# Altium PCB Dot_Matrix.PcbDoc
Units mm, origin at the board's own origin, x right, y up, seen from the top; angles counter-clockwise.
Board outline 63.12 x 62.99 mm, 2 copper layers (Top Layer, Bottom Layer); 61 components, 67 nets, 215 pads, 86 vias.
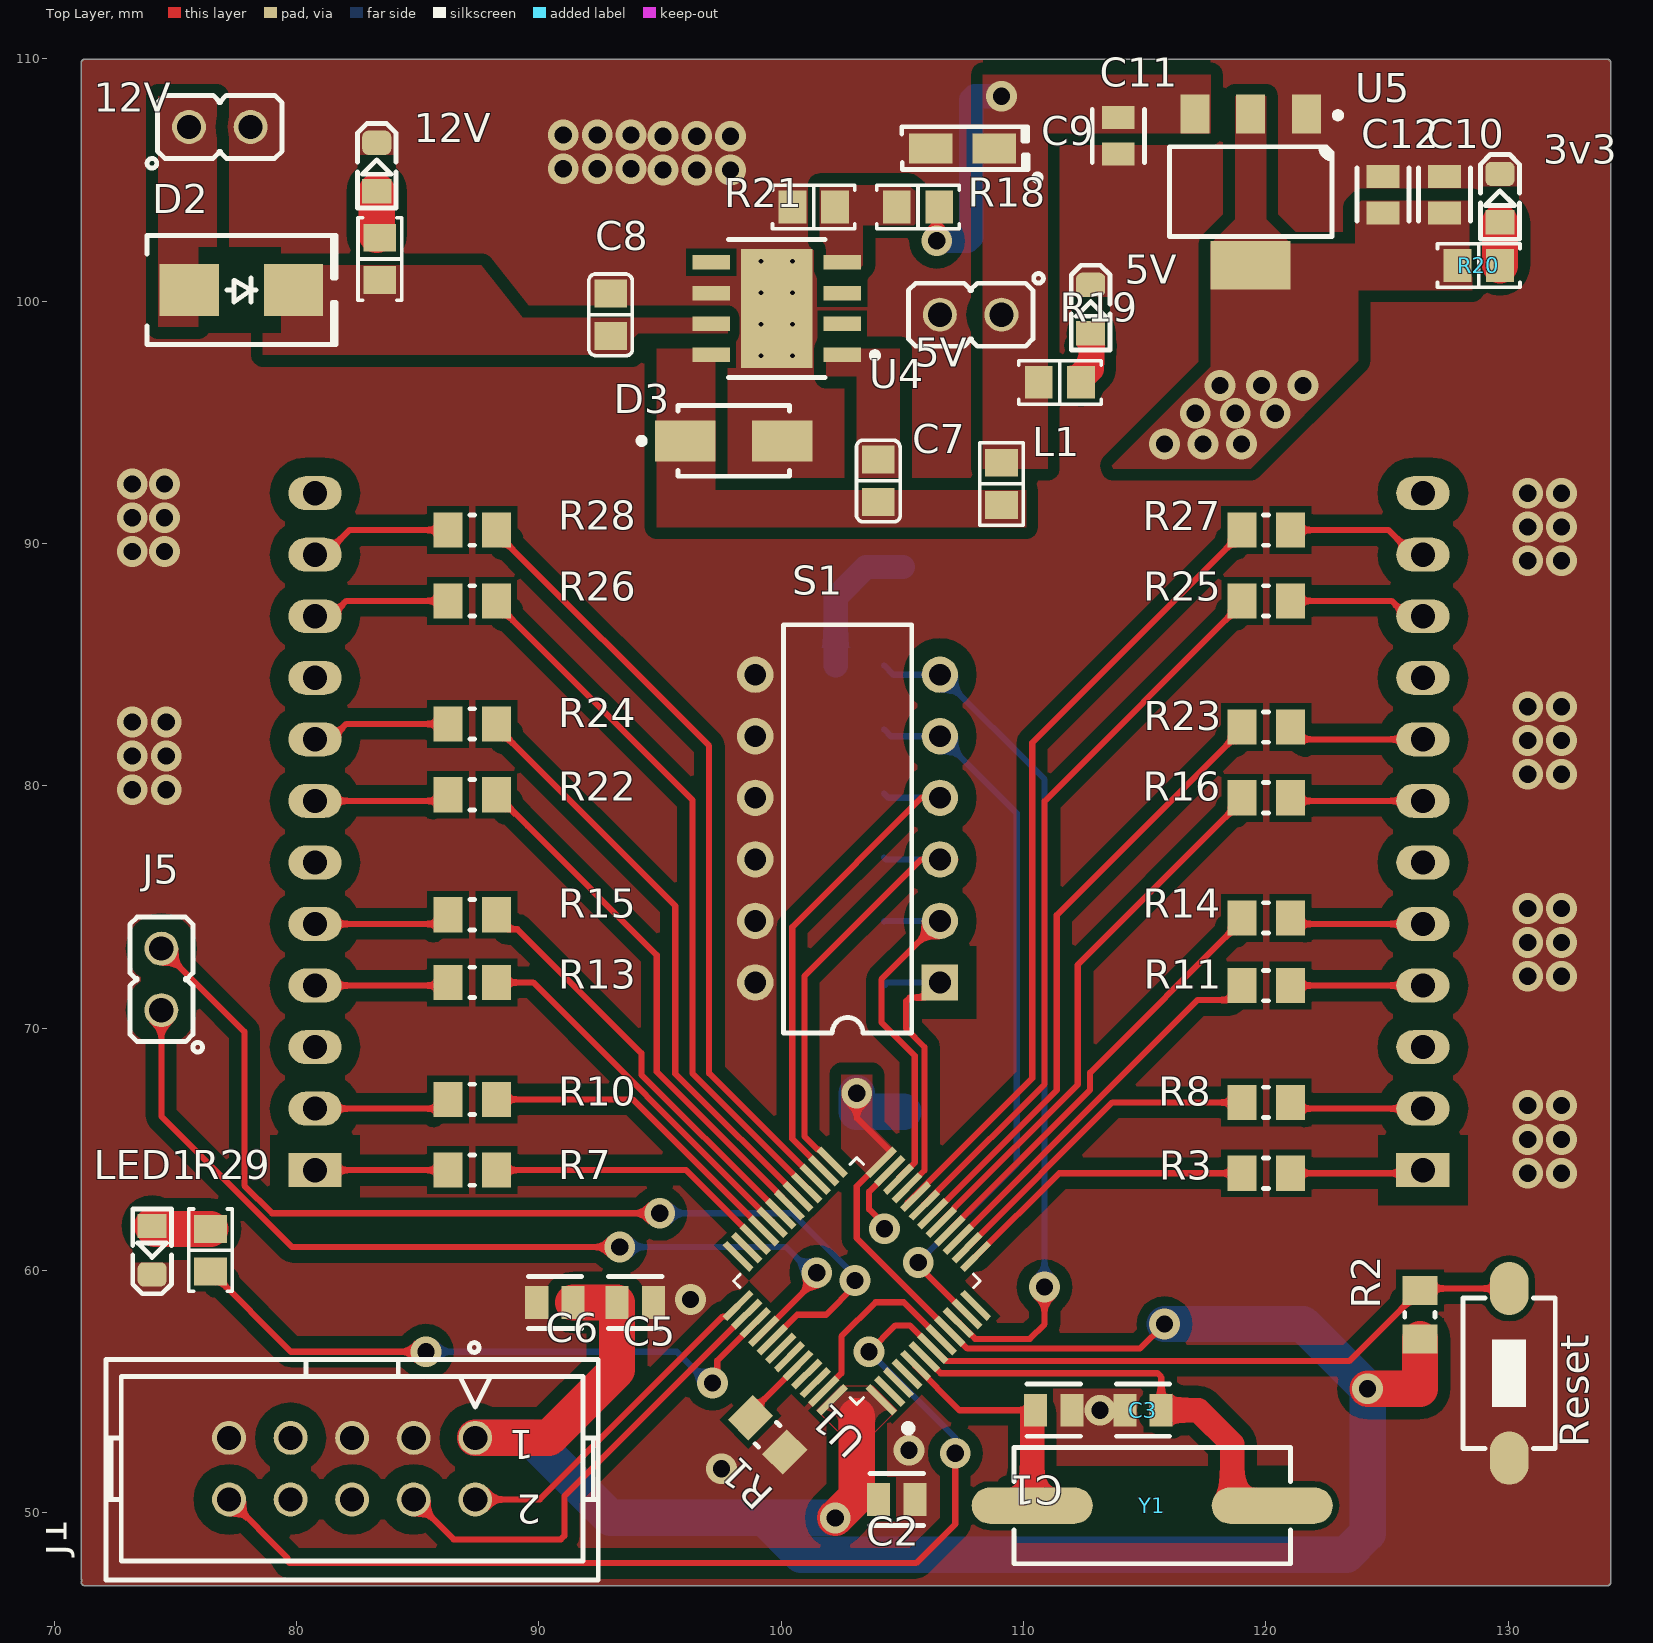
[diagram p0: Top Layer view]
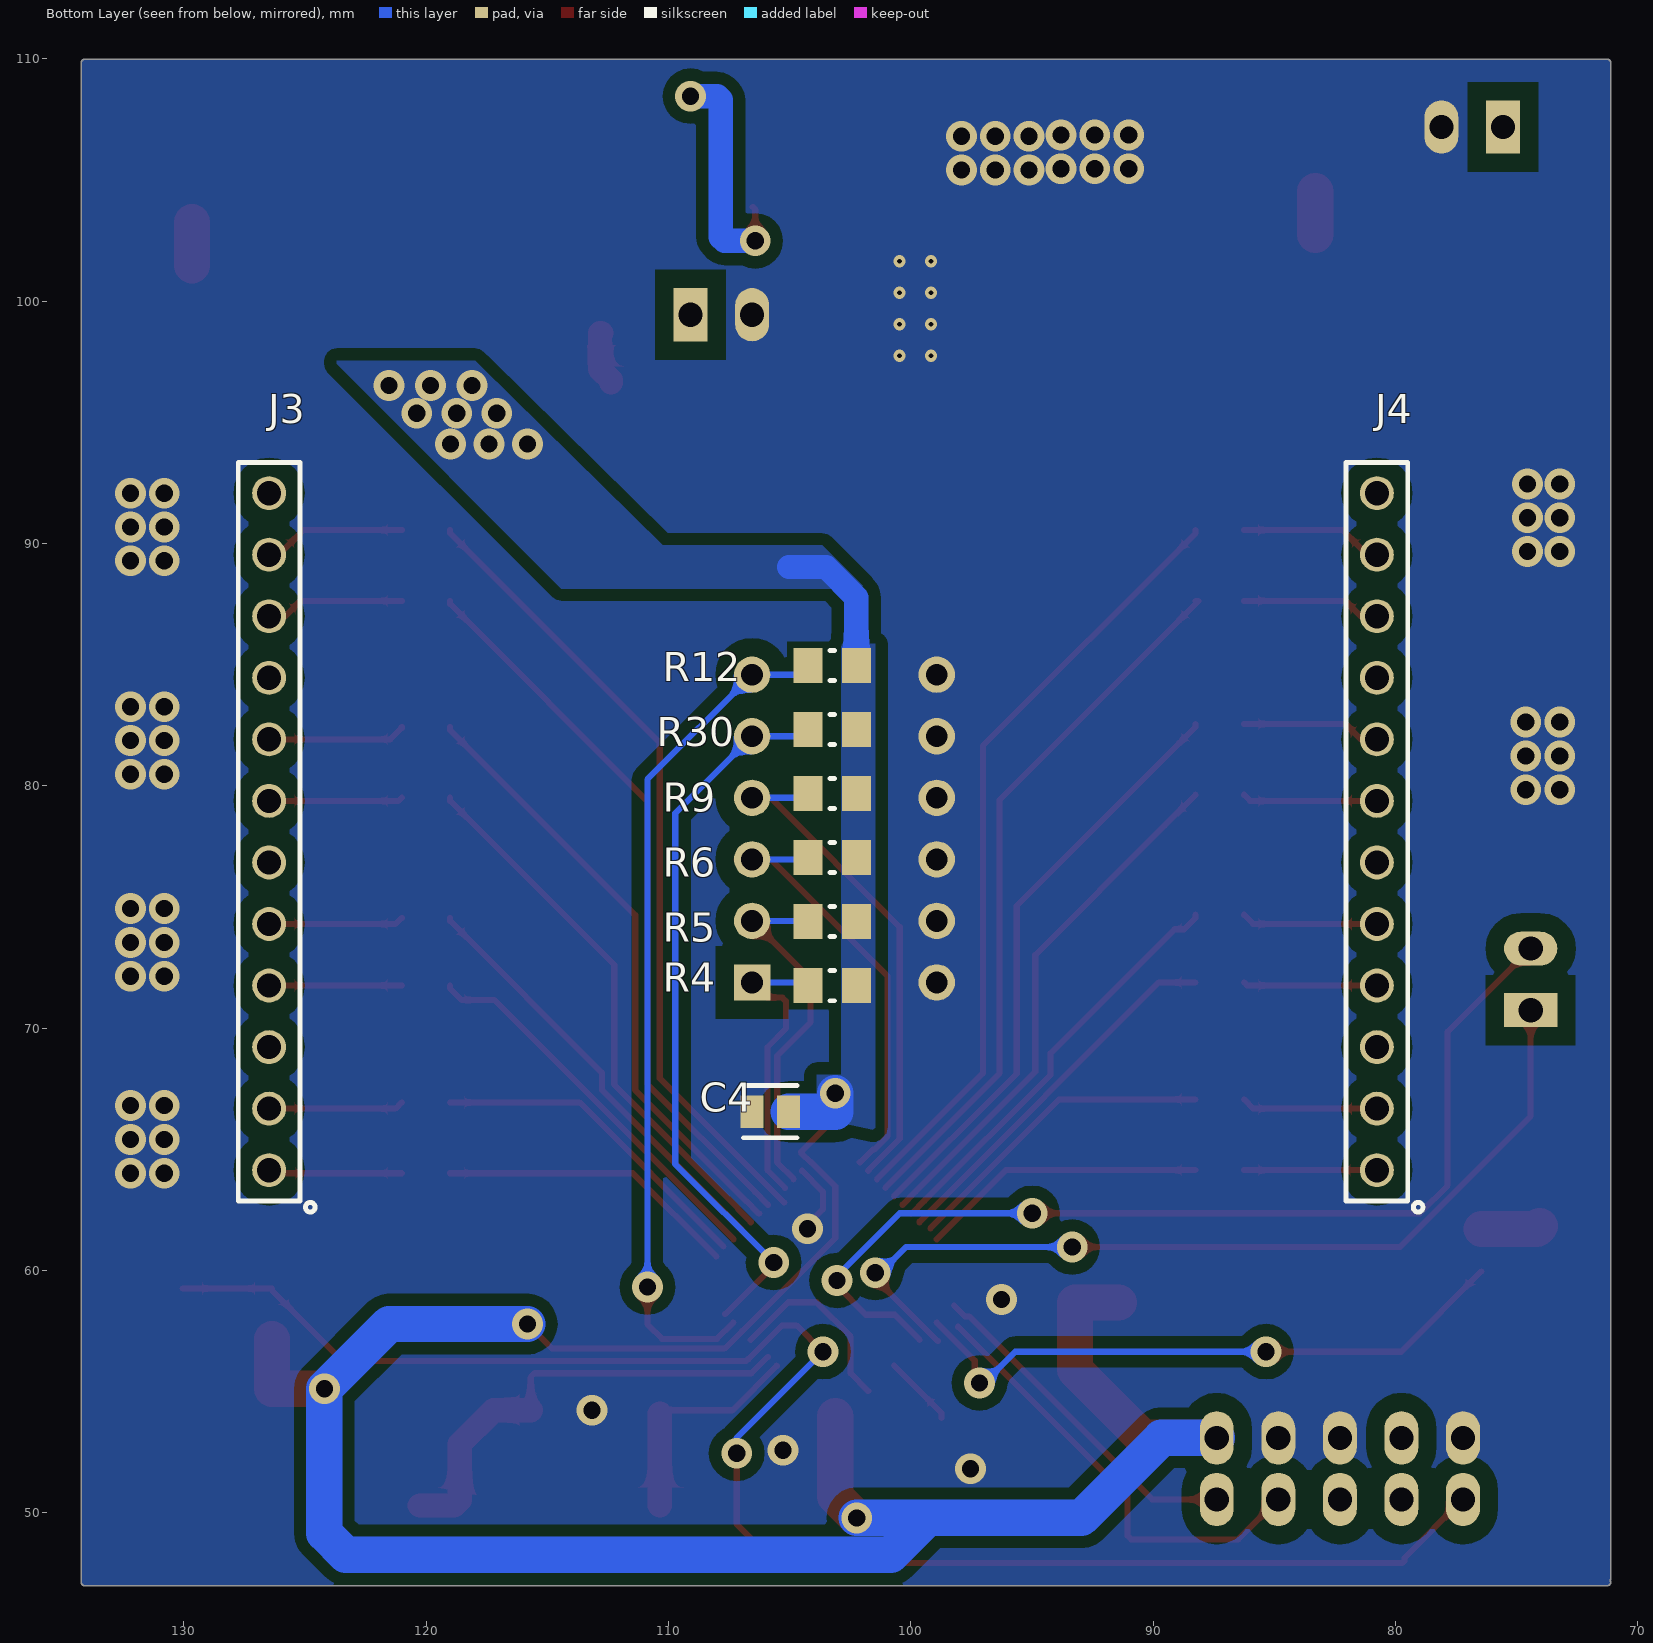
[diagram p1: Bottom Layer view, seen from below]

## Layer stack, top to bottom
Top Solder: solder mask 0.0102, Solder Resist, Dk 3.5
Top Layer: signal copper 0.0356
Dielectric 1: dielectric 0.32, FR-4, Dk 4.8
Bottom Layer: signal copper 0.0356
Bottom Solder: solder mask 0.0102, Solder Resist, Dk 3.5

## Board outline
71.144,47.191 cw(c71.247,47.266) 71.12,47.266 71.12,109.855 cw(c71.247,109.855) 71.247,109.982 134.112,109.982 cw(c134.112,109.855) 134.239,109.855 134.239,47.415 cw(c134.112,47.415) 134.238,47.393 cw(c134.112,47.371) 134.239,47.371 134.239,47.117 cw(c134.112,47.117) 134.112,46.99 71.247,46.99 cw(c71.247,47.117)

## Design rules (kind name [scope] priority, off if disabled: settings)
Clearance [All] p1: gap=0.254 ignorepadtopadclearanceinfootprint=TRUE except(0: Arc-Hole Track-Hole SMDPad-Hole THPad-Hole Via-Hole Fill-Hole Poly-Hole Region-Hole Text-Hole; 0.1: Arc-SMDPad Track-SMDPad SMDPad-SMDPad; 0.15: Arc-Arc Arc-Track Track-Track; 0.5: Arc-Fill Arc-Poly Arc-Region Track-Fill Track-Poly Track-Region Via-Fill Via-Poly Via-Region Fill-Fill Fill-Poly Fill-Region Poly-Poly Poly-Region Region-Region; 0.75: THPad-Fill THPad-Poly THPad-Region)
PolygonConnect [All] p1: connectstyle=Direct reliefconductorwidth=0.254 reliefentries=4 polygonreliefangle="90 Angle" airgapwidth=0.254
RoutingVias [All] p1: holewidth=0.711 width=1.27 viastyle="Through Hole" minholewidth=0.711 minwidth=1.27 maxholewidth=0.711 maxwidth=1.27
SolderMaskExpansion [All] p1: expansion=0.102 istentingtop=FALSE
UnpouredPolygon [All] p1: allowunpoured=TRUE
Width [All] p1: maxlimit=2 minlimit=0.254 preferedwidth=0.254 minimp=50.000000 maximp=50.000000 favimp=50.000000
29 further rules are at their usual default settings.

## Classes and differential pairs
component class Dot_Matrix: C1 C2 C3 C4 C5 C6 C7 C8 C9 C10 C11 C12 D2 D3 J1 J3 J4 J5 L1 LED1 R1 R2 R3 R4 R5 R6 R7 R8 R9 R10 R11 R12 R13 R14 R15 R16 R18 R19 R20 R21 R22 R23 R24 R25 R26 R27 R28 R29 R30 S1 U1 U4 U5 Y1

## Components (designator, comment, footprint, x,y, rotation, side; value= is the part's Value field where it differs from the comment)
3v3 "LED SMD 0805 RED" LED_0805_RED 129.667,104.251 r90 top (schematic designator LED3)
5V "HDRM2" HDR_1X2 107.823,99.441 r180 top (schematic designator J6)
5V "LED SMD 0805 RED" LED_0805_RED 112.776,99.679 r90 top (schematic designator LED4)
12V "LED SMD 0805 RED" LED_0805_RED 83.312,105.537 r90 top (schematic designator LED2)
12V "HDRM2" HDR_1X2 76.835,107.188 r0 top (schematic designator J2)
C1 "22pF" FP-C0805C-DN-MFG 111.252,54.229 r180 top value="0.22 μF"
C2 "100nF" FP-C0805C-DN-MFG 104.775,50.546 r0 top value="0.22 μF"
C3 "22pF" FP-C0805C-DN-MFG 114.935,54.229 r0 top value="0.22 μF"
C4 "100nF" FP-C0805C-DN-MFG 105.803,66.548 r0 bottom value="0.22 μF"
C5 "100nF" FP-C0805C-DN-MFG 93.98,58.674 r0 top value="0.22 μF"
C6 "100nF" FP-C0805C-DN-MFG 90.666,58.674 r180 top value="0.22 μF"
C7 "100nF" "CAP 0805_2012" 104.013,92.583 r270 top
C8 "10uF" "CAP 0805_2012" 92.964,99.441 r270 top value=100nF
C9 "220uF" "CAP TANSMD 1206_3216 CASE A" 107.482,106.299 r180 top value="10uF 6.3V"
C10 "10uF" FP-C0805C-DN-MFG 127.381,104.394 r270 top value="0.22 μF"
C11 "10uF" FP-C0805C-DN-MFG 113.919,106.819 r90 top value="0.22 μF"
C12 "100nF" FP-C0805C-DN-MFG 124.841,104.394 r270 top value="0.22 μF"
D2 "SS36" "DO-214AA SMB" 77.724,100.457 r0 top
D3 "B340A-13-F" FP-SMA-MFG 98.044,94.234 r0 top
J1 "IDC_2X5" IDC_2X5 82.296,51.816 r180 top
J3 "HDRF12" HDR_F_1X12 126.487,78.105 r90 bottom
J4 "HDRF12" HDR_F_1X12 80.767,78.105 r90 bottom
J5 "HDRM2" HDR_1X2 74.422,72.009 r90 top
L1 "15uH" "IND 0805_2012" 109.093,92.456 r90 top
LED1 "LED SMD 0805 RED" LED_0805_RED 74.041,60.833 r270 top
R1 "10k" RESC2013X60X35ML10T20 99.441,53.213 r135 top
R2 "10k" RESC2013X60X35ML10T20 126.365,58.166 r90 top
R3 "100" RESC2013X60X35ML10T20 120.015,64.008 r0 top
R4 "10k" RESC2013X60X35ML10T20 103.251,71.755 r0 bottom
R5 "10k" RESC2013X60X35ML10T20 103.251,74.397 r0 bottom
R6 "10k" RESC2013X60X35ML10T20 103.251,77.038 r0 bottom
R7 "100" RESC2013X60X35ML10T20 87.249,64.135 r180 top
R8 "100" RESC2013X60X35ML10T20 120.015,66.929 r0 top
R9 "10k" RESC2013X60X35ML10T20 103.251,79.68 r0 bottom
R10 "100" RESC2013X60X35ML10T20 87.249,67.056 r180 top
R11 "100" RESC2013X60X35ML10T20 120.015,71.755 r0 top
R12 "10k" RESC2013X60X35ML10T20 103.251,84.963 r0 bottom
R13 "100" RESC2013X60X35ML10T20 87.249,71.882 r180 top
R14 "100" RESC2013X60X35ML10T20 120.015,74.549 r0 top
R15 "100" RESC2013X60X35ML10T20 87.249,74.676 r180 top
R16 "100" RESC2013X60X35ML10T20 120.015,79.502 r0 top
R17 "470" "RES 0805_2012" 83.439,101.741 r90 top value=1K
R18 "10K" "RES 0805_2012" 105.65,103.886 r0 top value=1K
R19 "330" "RES 0805_2012" 111.506,96.647 r0 top value=1K
R20 "330" "RES 0805_2012" 128.792,101.473 r0 top value=1K
R21 "3.24k" "RES 0805_2012" 101.346,103.886 r0 top value=1K
R22 "100" RESC2013X60X35ML10T20 87.249,79.629 r180 top
R23 "100" RESC2013X60X35ML10T20 120.015,82.423 r0 top
R24 "100" RESC2013X60X35ML10T20 87.249,82.55 r180 top
R25 "100" RESC2013X60X35ML10T20 120.015,87.63 r0 top
R26 "100" RESC2013X60X35ML10T20 87.249,87.63 r180 top
R27 "100" RESC2013X60X35ML10T20 120.015,90.551 r0 top
R28 "100" RESC2013X60X35ML10T20 87.249,90.551 r180 top
R29 "470" "RES 0805_2012" 76.454,60.833 r90 top value=1K
R30 "10k" RESC2013X60X35ML10T20 103.251,82.321 r0 bottom
Reset "Tactile 2PIN 6X3.5mm H4.57mm (SMD)" SWPBS_SPST_6X3X5 130.048,55.753 r270 top (schematic designator SW1)
S1 "SW DIP-6" DIP-12/SW 102.743,78.232 r90 top
U1 "STM32F030C8T6" QFP50P900X900X160-48N 103.124,59.563 r135 top
U4 "TPS5430DDA" FP-DDA0008J-MFG 99.822,99.695 r180 top
U5 "LD1117-3.3V" "SOT-223-4 6.5X7MM P2.3MM" 119.38,104.521 r270 top
Y1 "8MHz" "HC-49S SMD" 115.316,50.292 r180 top

## Footprints (in the part's own frame and the unit in brackets; to place one, negate y for a bottom-side part, rotate by r counter-clockwise, add the part's x,y. Pads: shape width x height; smd on the part's side, far side on the other; paste and mask are expansions set on the pad)
"CAP 0805_2012" [mm] "Chip Capacitor, 2-Leads, Body 2.00x1.20mm, IPC Medium Density"
  rect 1.15x1.35 smd: 1(-0.875,0) 2(0.875,0)
  silkscreen extent -1.68,-0.9 1.69,0.9, body extent -0.99,-0.62 1.01,0.65, height 1.26
"CAP TANSMD 1206_3216 CASE A" [mm] "Molded Capacitor, 2-Leads, Body 3.20x1.6mm, Case A, IPC Medium Density"
  rect 1.8x1.23 smd: 1(-1.31,0) 2(1.31,0)
  silkscreen extent -3.22,-0.9 2.5,1.32, body extent -1.72,-0.85 1.71,0.85, height 1.7
DIP-12/SW [mm] "DIP Switch; 12 Leads"
  rect 1.5x1.5 hole 0.9: 1(-6.35,-3.81)
  round 1.5 hole 0.9: 2(-3.81,-3.81) 3(-1.27,-3.81) 4(1.27,-3.81) 5(3.81,-3.81) 6(6.35,-3.81) 7(6.35,3.81) 8(3.81,3.81) 9(1.27,3.81) 10(-1.27,3.81) 11(-3.81,3.81) 12(-6.35,3.81)
  silkscreen extent -8.43,-2.65 8.41,2.65
"DO-214AA SMB" [mm] "Molded Diode, 2-Leads, Body 4.31x3.62mm, IPC Medium Density"
  rect 2.45x2.15 smd: 1(-2.15,0) 2(2.15,0)
  Top Layer pour cut-out: -1.778,1.778 1.651,1.778 1.651,-1.778 -1.778,-1.778
  silkscreen extent -3.9,-2.25 3.9,2.25, body extent -2.6,-1.8 2.6,1.8, height 2.4
FP-C0805C-DN-MFG [mm]
  rect 0.95x1.35 smd paste+0 mask+0: 1(-0.75,0) 2(0.75,0)
  silkscreen extent -1.1,-1.07 1.1,1.07, body extent -1.4,-0.85 1.4,0.85, height 0.25
FP-DDA0008J-MFG [mm]
  rect 1.55x0.6 smd paste+0 mask+0: 1(-2.7,1.905) 2(-2.7,0.635) 3(-2.7,-0.635) 4(-2.7,-1.905) 5(2.7,-1.905) 6(2.7,-0.635) 7(2.7,0.635) 8(2.7,1.905)
  rect 2.95x4.9 smd paste-1000 mask-1000: 9(0,0)
  silkscreen extent -4.18,-2.85 2,2.85, body extent -3.01,-2.45 3.01,2.45, height 1.7
FP-SMA-MFG [mm]
  rect 2.5x1.7 smd paste+0 mask+0: 1(-2,0) 2(2,0)
  silkscreen extent -3.92,-1.46 2.3,1.46, body extent -3.35,-1.56 3.35,1.56, height 0.25
"HC-49S SMD" [mm] "SMD crystal resonator, ABL, ABLS, HC-49, HC49 11X4.5MM"
  oval 5x1.5 smd: 1(-4.953,0) 2(4.953,0)
  Top Layer pour cut-out: -5.715,1.524 5.715,1.524 5.715,-1.778 5.588,-1.651 -5.715,-1.651
  silkscreen extent -5.7,-2.4 5.7,2.4, body extent -6.4,-2.41 6.4,2.42, height 4.3
HDR_1X2 [mm] "Connector; Header; 2 Position"
  round 1.4 / inner round 1.4 / far side rect 1.4x2.2 hole 1 mask+0.1: 1(-1.27,0)
  round 1.4 / inner round 1.4 / far side oval 1.4x2.2 hole 1 mask+0.1: 2(1.27,0)
  silkscreen extent -3,-1.7 2.57,1.3
HDR_F_1X12 [mm] "Connector; Header; 12 Position"
  round 1.4 / inner round 1.4 / far side rect 1.4x2.2 hole 1: 1(-13.97,0)
  round 1.4 / inner round 1.4 / far side oval 1.4x2.2 hole 1: 2(-11.43,0) 3(-8.89,0) 4(-6.35,0) 5(-3.81,0) 6(-1.27,0) 7(1.27,0) 8(3.81,0) 9(6.35,0) 10(8.89,0) 11(11.43,0) 12(13.97,0)
  silkscreen extent -15.7,-1.9 15.24,1.27, body extent -15.24,-1.27 15.24,1.27, height 8.5
IDC_2X5 [mm] "IDC, HEADER BOX 2X5, 10p, 2.54mm pitch"
  round 1.4 / inner round 1.4 / far side oval 1.4x2.2 hole 1 mask+0.1: 1(-5.08,-1.27) 2(-5.08,1.27) 3(-2.54,-1.27) 4(-2.54,1.27) 5(0,-1.27) 6(0,1.27) 7(2.54,-1.27) 8(2.54,1.27) 9(5.08,-1.27) 10(5.08,1.27)
  silkscreen extent -10.16,-5.2 10.16,4.6, body extent -10.18,-4.42 10.18,4.75, height 9.13
"IND 0805_2012" [mm]
  rect 1.15x1.35 smd: 1(-0.875,0) 2(0.875,0)
  silkscreen extent -1.7,-0.9 1.7,0.9, body extent -1,-0.62 1,0.63, height 1.1
LED_0805_RED [mm] "LED SMD 0805, RED"
  rect 1x1.2 smd mask+0.075: 1(-1,0)
  rrect50% 1x1.2 smd mask+0.075: 2(1,0)
  Top Layer pour cut-out: -0.5,0.8 0.5,0.8 0.5,-0.8 -0.5,-0.8
  silkscreen extent -1.7,-0.8 1.8,0.8, body extent -1,-0.63 1,0.63, height 0.7
QFP50P900X900X160-48N [mm]
  rect 1.56x0.28 smd: 1(-4.18,2.75) 2(-4.18,2.25) 3(-4.18,1.75) 4(-4.18,1.25) 5(-4.18,0.75) 6(-4.18,0.25) 7(-4.18,-0.25) 8(-4.18,-0.75) 9(-4.18,-1.25) 10(-4.18,-1.75) 11(-4.18,-2.25) 12(-4.18,-2.75) 25(4.18,-2.75) 26(4.18,-2.25) 27(4.18,-1.75) 28(4.18,-1.25) 29(4.18,-0.75) 30(4.18,-0.25) 31(4.18,0.25) 32(4.18,0.75) 33(4.18,1.25) 34(4.18,1.75) 35(4.18,2.25) 36(4.18,2.75)
  rect 0.28x1.56 smd: 13(-2.75,-4.18) 14(-2.25,-4.18) 15(-1.75,-4.18) 16(-1.25,-4.18) 17(-0.75,-4.18) 18(-0.25,-4.18) 19(0.25,-4.18) 20(0.75,-4.18) 21(1.25,-4.18) 22(1.75,-4.18) 23(2.25,-4.18) 24(2.75,-4.18) 37(2.75,4.18) 38(2.25,4.18) 39(1.75,4.18) 40(1.25,4.18) 41(0.75,4.18) 42(0.25,4.18) 43(-0.25,4.18) 44(-0.75,4.18) 45(-1.25,4.18) 46(-1.75,4.18) 47(-2.25,4.18) 48(-2.75,4.18)
  silkscreen extent -5.95,-3.6 3.6,3.6
"RES 0805_2012" [mm] "Chip Resistor, 2-Leads, Body 2.00x1.25mm, IPC Medium Density"
  rect 1.15x1.35 smd: 1(-0.875,0) 2(0.875,0)
  silkscreen extent -1.7,-0.9 1.7,0.9, body extent -0.95,-0.62 1.05,0.63, height 0.6
RESC2013X60X35ML10T20 [mm] "Chip Resistor, 2-Leads, Body 2.1x1.35mm, IPC Low Density"
  rect 1.2x1.45 smd: 1(-1,0) 2(1,0)
  silkscreen extent -0.1,-0.63 0.1,0.63, body extent -1.05,-0.68 1.05,0.67, height 0.6
"SOT-223-4 6.5X7MM P2.3MM" [mm] "SOT223, 4-Leads, Body 6.50x7.00mm (avg), Pitch 2.30mm, IPC Medium Density"
  rect 1.6x1.2 smd: 1(-3.2,2.3) 2(-3.2,0) 3(-3.2,-2.3)
  rect 2x3.3 smd: 4(3.048,0)
  silkscreen extent -3.27,-3.35 1.85,3.73, body extent -3.52,-3.25 3.5,3.25, height 1.8
SWPBS_SPST_6X3X5 [mm] "SWITCH, PUSHBUTTON, SMD, SPST, 6X3.5mm, SKQMBBE010, 50000 Cycles, 1.57N Force"
  oval 2.2x1.6 smd mask+0.1: 1(-3.5,0) 2(3.5,0)
  silkscreen extent -3.1,-1.9 3.1,1.9, body extent -3.65,-1.75 3.65,1.75, height 5

## Part data
5V 12V J5: library part HDR_1X2, "CONN, HEADER, Male, pitch: 2.54mm, 2POS"
C1 C2 C3 C4 C5 C6 C10 C11 C12: library part CMP-1036-04552-2, "CAP CER 0.22UF 50V X7R 0805", Capacitance="0.22 μF", Manufacturer=KEMET, Manufacturer Part Number=C0805C224K5RACTU, Package=C0805C-DN, Temperature="-55°C to +125°C", Temperature Characteristic=X7R, Temperature Coefficient=30ppm/°C, Temperature Range High=+125°C, Temperature Range Low=-55°C, Tolerance=0.1, Voltage Rating="50 V", Automotive=No, Category=Cap, ComponentLink2Description=Datasheet, ComponentLink2URL=https://content.kemet.com/datasheets/KEM_C1003_C0G_SMD.pdf, Device Class L1="Passive Components", Device Class L2=Capacitors, Device Class L3="Ceramic Capacitors", Digikey Description="CAP CER 0.22UF 50V X7R 0805", Height=0.88mm, Ipc Land Pattern Name=CAPC200125X78, Lead Free=Yes, Material=Ceramic, Mouser Description="CAP CER 0.22UF 50V X7R 0805", Octopart=https://octopart.com/c0805c224k5ractu-kemet-144670, RoHS=TRUE
C7 C8: library part "Cap 0805", "SMT Capacitor"
C9: library part "Cap Tan Case A", "SMT Tantalum Capacitor"
D2: library part "SS36 (SMD SMC)", "Diode Schottky 60V 3A Surface Mount DO-214AB (SMC)", PartNumber=SS36-E3/57T
D3: library part CMP-1667-00003-3, "DIODE SCHOTTKY 40V 3A SMA", Average Rectified Current=3A, Capacitance=250pF, Case/Package=SMA, Forward Voltage=500mV, Max Forward Surge Current (Ifsm)=80A, Max Operating Temperature=125°C, Max Repetitive Reverse Voltage (Vrrm)=40V, Max Reverse Current=500uA, Min Operating Temperature=-55°C, Package Quantity=5000, Contact Plating=Tin, Current=3A, Current Rating=3A, Element Configuration=Single, Forward Current=3A, Height=2.3mm, Lead Free="Lead Free", Length=4.6mm, Max Reverse Voltage (DC)=40V, Mount="Surface Mount", Number of Pins=2, Output Current=3A, Packaging="Tape and Reel", Peak Non-Repetitive Surge Current=80A, Polarity=Standard, Radiation Hardening=No, REACH SVHC="No SVHC", RoHS Compliant=Yes, Series=-, Termination=SMD/SMT, Voltage=40V, Voltage Rating (DC)=40V, Weight=0.002258oz, Width=2.92mm
J1: "CONN, IDC, Male, pitch: 2.54mm, 10POS"
J3 J4: library part HDR_F_1X12, "CONN, HEADER, Female, pitch: 2.54mm, 12POS"
L1: library part "Ind 0805", "SMT Inductor"
R1 R2 R3 R4 R5 R6 R7 R8 R9 R10 R11 R12 R13 R14 R15 R16 R22 R23 R24 R25 R26 R27 R28 R30: library part CMP-2100-03673-1, "Chip Resistor, 0 Ohm, Jumper, +/- 5%, 0.125 W, -55 to 155 degC, 0805 (2012 Metric), RoHS, Tape and Reel", Case Code (Imperial)=0805, Case Code (Metric)=2012, Manufacturer=Yageo, Max Operating Temperature=155degC, Min Operating Temperature=-55degC, Package Description="2-Pin Surface Mounted Device, Body 2 x 1.25 mm", Power Rating=125mW, Resistance=0mOhm, Temperature Coefficient=200ppm/degreesC, Tolerance=5%, Voltage Rating=150V, Case/Package=0805, Composition=ThickFilm, Contact Plating=Tin, Datasheet URL=http://www.yageo.com/NewPortal/yageodocoutput?fileName=/pdf/R-Chip/PYu-RC_Group_51_RoHS_L_5.pdf, Datasheet Version="Rev. 5, 10/2016", Depth=1.25mm, Height=0.5mm, Lead Free=LeadFree, Length=2mm, Manufacturer URL=http://www.yageo.com/, Military Standard=Not, Number of Pins=2, Package Reference=0805, Packaging=TapeandReel, Radiation Hardening=No, REACH SVHC=Unknown, RoHSCompliant=true, Termination=SMD/SMT, Voltage Rating (DC)=150V, Width=1.25mm
R17 R18 R19 R20 R21 R29: library part "Res 0805", "SMT Resistor"
Reset: "Tactile Switch SPST-NO Top Actuated Surface Mount", PartNumber=FSMSMTR-ND
S1: "DIP Switch, 6 Position, SPST", LatestRevisionDate=17-Jul-2002, LatestRevisionNote="Re-released for DXP Platform.", PackageDescription="DIP Switch; 12 Leads", PackageReference=DIP-12/SW, Published=24-Mar-1999, Publisher="Altium Limited"
U1: "STM32F Series 32-bit 64 kB Flash 8 kB RAM ARM Based Microcontroller - LQFP-48", Package=None, Availability=Unavailable, MP=STM32F030C8T6, Price=None
U4: library part CMP-2000-04960-2, "IC REG BUCK ADJUSTABLE 3A 8SOPWR", Manufacturer="Texas Instruments", Max Junction Temp=+125°C, Max Supply Voltage=36V, Min Supply Voltage=5.5V, Nominal Supply Current=3mA, Output Current=3A, Output Voltage=1.23-31V, Package=DDA0008J, Switching Frequency=500kHz, Temperature="-40°C to +125°C", Temperature Range Low=-40°C, Automotive=No, Category=IC, ComponentLink2Description=Datasheet, ComponentLink2URL=http://www.ti.com/lit/ds/symlink/tps5431.pdf, Device Class L1="Integrated Circuits (ICs)", Device Class L2="Power Management ICs", Device Class L3="Voltage Regulators - Switching", Digikey Description="IC REG BUCK ADJUSTABLE 3A 8SOPWR", Height=1.7mm, Lead Free=Yes, Manufacturer Part Number=TPS5430DDA, Max Duty Cycle=89%, Mouser Description="Voltage Regulators - Switching Regulators 5.5 to 36V Input 3A Step Dwn Converter", Number Of Outputs=1, Octopart=https://octopart.com/tps5430dda-texas+instruments-589977, Output Type=AdjustableProgrammable, RoHS=TRUE, Standoff Height=0mm, Switching Topology=Buck, Temperature Range High=+125°C
U5: library part "LD1117-3.3V (SMD SOT-223)", "Linear Voltage Regulator IC  1 Output  800mA SOT-223", PartNumber=LD1117S33CTR
Y1: library part "Crystal HC-49S SMD 8MHz", "SMT Crystal", PartNumber=ABLS-8.000MHZ-K4T

## Via types
v1: diameter 1.27, hole 0.711, Top Layer to Bottom Layer, 78 vias
v2: diameter 0.5, hole 0.2, Top Layer to Bottom Layer, 8 vias

## Nets (pads, with @x,y where several pads share a name; then routed paths per layer and width w, separated by ;. In a path a pad name is that pad's centre, name@x,y a point inside that pad or via, vN(x,y) a via of type N, cw(c..) or ccw(c..) an arc to the next point about the centre after c; other vN are vias at no path point)
3v3: C2.1 C4.1 C5.1 C6.1 C10.2 C12.2 J1.1 R2.1 R4.1 R5.1 R6.1 R9.1 R12.1 R20.1 R30.1 U1.1 U1.9 U1.24 U1.48 U5.2 U5.4 | length 108.9
  Top Layer w0.254: v1(103.124,67.31) 103.124,66.294 104.536,64.882 104.536,64.864 U1.24 104.117,64.463 103.124,63.47 103.124,61.331 U1.9 107.686,56.769 114.808,56.769 v1(115.824,57.785)
  Top Layer w1.5: J1.1 90.424,53.086 93.23,55.892 C5.1 C6.1 ; v1(102.235,49.784) 103.124,50.673 103.124,53.975 ; v1(124.206,55.118) 126.365,55.118 R2.1
  Bottom Layer w1: R12.1 102.251,87.773 103.505,89.027 105.029,89.027
  Bottom Layer w1.5: J1.1 89.662,53.086 90.424,52.324 92.964,49.784 99.314,49.784 ; v1(102.235,49.784) 99.314,49.784 ; v1(103.124,67.31) 103.124,66.548 C4.1 ; v1(115.824,57.785) 121.539,57.785 v1(124.206,55.118) 124.206,49.149 123.317,48.26 100.838,48.26 99.314,49.784
  other v1: 115.824,94.107 117.411,94.107 118.999,94.107 117.094,95.377 118.745,95.377 120.396,95.377 118.11,96.52 119.825,96.52 121.539,96.52
12v: 12V.1@75.565,107.188 D2.1
+5: 5V.1@109.093,99.441 C9.1 C11.2 L1.2 R18.2 R19.1 U5.3 | length 9.9
  Top Layer w0.254: v1(106.426,102.489) 106.426,103.787 R18.2
  Bottom Layer w1: v1(106.426,102.489) 107.696,102.489 107.845,102.638 107.845,108.309 107.994,108.458 v1(109.093,108.458)
C1: J3.12
C2: J3.9
C3: J3.6
C4: J3.3
C5: J4.12
C6: J4.9
C7: J4.6
C8: J4.3
GND: 3v3.2 5V.2 12V.2 C1.1 C2.2 C3.1 C4.2 C5.2 C6.2 C8.1 C9.2 C10.1 C11.1 C12.1 D3.2 J1.3 J1.5 J1.9 LED1.2 R1.1 R21.1 Reset.2 S1.7 S1.8 S1.9 S1.10 S1.11 S1.12 U1.8 U1.23 U1.47 U4.6 U4.9 U5.1 | length 10.9
  Top Layer w0.254: U1.47 102.489,55.746 102.489,57.277 103.896,58.684 105.063,58.684 U1.8 ; v1(104.267,61.722) 104.267,61.889 103.632,62.524 103.632,63.253 U1.23
  other v1: 97.536,51.816 105.283,52.578 113.157,54.229 96.266,58.801 130.81,64.008 132.207,64.008 130.81,65.405 132.207,65.405 130.81,66.802 132.207,66.802 130.81,72.136 132.207,72.136 130.81,73.533 132.207,73.533 130.81,74.93 132.207,74.93 73.226,79.835 74.623,79.835 130.81,80.47 132.207,80.47 73.226,81.232 74.623,81.232 130.81,81.867 132.207,81.867 73.226,82.629 74.623,82.629 130.81,83.264 132.207,83.264 130.81,89.281 132.207,89.281 73.226,89.662 74.549,89.662 130.81,90.678 132.207,90.678 73.226,91.059 74.549,91.059 130.81,92.075 132.207,92.075 73.226,92.456 74.549,92.456 95.123,105.41 96.52,105.41 97.917,105.41 91.011,105.463 92.408,105.463 93.805,105.463 95.123,106.807 96.52,106.807 97.917,106.807 91.011,106.86 92.408,106.86 93.805,106.86
  other v2: 99.172,97.745 100.472,97.745 99.172,99.045 100.472,99.045 99.172,100.345 100.472,100.345 99.172,101.645 100.472,101.645
NetC7_1: C7.1 U4.1
NetC7_2: C7.2 D3.1 L1.1 U4.8
NetJ3_1: J3.1 R3.2 | length 5.5
  Top Layer w0.254: R3.2 126.36,64.008 J3.1
NetJ3_2: J3.2 R8.2 | length 5.6
  Top Layer w0.254: R8.2 121.269,66.675 J3.2
NetJ3_4: J3.4 R11.2 | length 5.5
  Top Layer w0.254: R11.2 J3.4
NetJ3_5: J3.5 R14.2 | length 5.6
  Top Layer w0.254: R14.2 121.269,74.295 J3.5
NetJ3_7: J3.7 R16.2 | length 5.5
  Top Layer w0.254: R16.2 121.142,79.375 J3.7
NetJ3_8: J3.8 R23.2 | length 5.7
  Top Layer w0.254: R23.2 121.015,82.388 121.488,81.915 J3.8
NetJ3_10: J3.10 R25.2 | length 5.7
  Top Layer w0.254: R25.2 125.193,87.63 125.828,86.995 J3.10
NetJ3_11: J3.11 R27.2 | length 5.9
  Top Layer w0.254: R27.2 125.071,90.551 126.087,89.535 J3.11
NetJ4_1: J4.1 R7.2 | length 5.5
  Top Layer w0.254: J4.1 R7.2
NetJ4_2: J4.2 R10.2 | length 5.6
  Top Layer w0.254: J4.2 85.868,66.675 R10.2
NetJ4_4: J4.4 R13.2 | length 5.5
  Top Layer w0.254: J4.4 86.122,71.755 R13.2
NetJ4_5: J4.5 R15.2 | length 5.6
  Top Layer w0.254: J4.5 85.868,74.295 R15.2
NetJ4_7: J4.7 R22.2 | length 5.6
  Top Layer w0.254: J4.7 85.995,79.375 R22.2
NetJ4_8: J4.8 R24.2 | length 5.7
  Top Layer w0.254: J4.8 81.426,81.915 82.061,82.55 R24.2
NetJ4_10: J4.10 R26.2 | length 5.7
  Top Layer w0.254: J4.10 81.426,86.995 82.061,87.63 R26.2
NetJ4_11: J4.11 R28.2 | length 5.9
  Top Layer w0.254: J4.11 81.167,89.535 82.183,90.551 R28.2
NetLED1_1: LED1.1 R29.2 | length 2.5
  Top Layer w1.5: LED1.1 74.166,61.708 R29.2
NetLED2_1: 12V.1@83.312,104.537 R17.2 | length 1.8
  Top Layer w1.5: R17.2@83.312,102.743 12V.1@83.312,104.537
NetLED3_1: 3v3.1 R20.2 | length 1.8
  Top Layer w1.5: R20.2 3v3.1
NetLED4_1: 5V.1@112.776,98.679 R19.2 | length 2.3
  Top Layer w1: R19.2 112.381,96.747 112.826,97.192 112.826,98.679 5V.1@112.776,98.679
NetR1_2: R1.2 U1.44 | length 3
  Top Layer w0.254: R1.2 98.734,54.112 99.669,55.047 U1.44
NetR18_1: R18.1 R21.2 U4.4
PA0: R12.2 S1.6 U1.10 | length 35.1
  Top Layer w0.254: U1.10 107.336,57.845 108.007,57.173 110.259,57.173 110.871,57.785 v1(110.871,59.309)
  Bottom Layer w0.254: R12.2 104.632,84.582 S1.6 110.871,80.264 v1(110.871,59.309)
PA1: R30.2 S1.5 U1.11 | length 30.1
  Top Layer w0.254: v1(105.664,60.325) 105.664,60.187 107.652,58.198 U1.11
  Bottom Layer w0.254: R30.2 104.53,82.042 S1.5 109.728,78.867 109.728,64.389 v1(105.664,60.325)
PB3: R29.1 U1.39 | length 25.8
  Top Layer w0.254: R29.1 79.77,56.642 v1(85.344,56.642) ; v1(97.171,55.356) 97.366,55.55 97.366,56.28 U1.39
  Bottom Layer w0.254: v1(85.344,56.642) 95.694,56.642 96.981,55.356 v1(97.171,55.356)
PB4: J5.1 U1.40 | length 38
  Top Layer w0.254: J5.1 74.422,66.358 79.82,60.96 v1(93.345,60.96) ; U1.40@98.892,57.081 101.473,59.661 v1(101.473,59.906)
  Bottom Layer w0.254: v1(93.345,60.96) 100.203,60.96 101.257,59.906 v1(101.473,59.906)
PB5: J5.2 U1.41 | length 42.7
  Top Layer w0.254: J5.2 77.851,69.85 77.851,63.5 78.994,62.357 v1(94.996,62.357) ; U1.41 100.666,58.166 101.854,58.166 103.046,59.358 v1(103.046,59.586)
  Bottom Layer w0.254: v1(94.996,62.357) 100.459,62.357 103.046,59.77 v1(103.046,59.586)
PB10: R4.2 S1.1 U1.21 | length 12.4
  Top Layer w0.254: U1.21 105.918,64.125 105.918,69.215 105.156,69.977 105.156,71.11 105.305,71.259 105.93,71.259 S1.1
  Bottom Layer w0.254: R4.2 104.378,71.882 S1.1
PB11: R5.2 S1.2 U1.22 | length 14.8
  Top Layer w0.254: U1.22 104.842,63.775 105.514,64.446 105.514,68.857 104.14,70.231 104.14,72.009 S1.2
  Bottom Layer w0.254: R5.2 104.276,74.422 S1.2
PB12: R6.2 S1.3 U1.25 | length 18.6
  Top Layer w0.254: U1.25 102.094,64.463 101.571,64.987 101.51,64.987 100.965,65.532 100.965,72.136 105.791,76.962 S1.3@106.426,76.962 ; S1.3 S1.3@107.188,76.962
  Bottom Layer w0.254: R6.2 104.327,76.962 S1.3
PB13: R9.2 S1.4 U1.26 | length 21.2
  Top Layer w0.254: U1.26 101.759,64.128 100.457,65.43 100.457,74.168 105.791,79.502 S1.4@106.426,79.502
  Bottom Layer w0.254: R9.2 104.429,79.502 S1.4
PF0: C1.2 U1.5 Y1.2 | length 9.7
  Top Layer w0.254: U1.5@105.53,56.058 107.359,54.229 C1.2 C1.2@110.363,54.09 ; U1.5@105.549,56.059 U1.5
  Top Layer w1: Y1.2 C1.2@110.363,54.09
PF1: C3.2 U1.6 Y1.1 | length 19.3
  Top Layer w0.254: U1.6 106.58,55.753 115.536,55.753 115.685,55.604 C3.2@115.685,54.029
  Top Layer w1: C3.2 117.221,54.229 118.618,52.832 118.618,50.523 118.849,50.292 Y1.1
R1_G: R27.1 U1.20 | length 33.5
  Top Layer w0.254: U1.20@105.227,62.794 110.363,67.931 110.363,81.774 119.015,90.426 R27.1
R1_R: R25.1 U1.19 | length 30.4
  Top Layer w0.254: U1.19 105.903,62.714 106.426,63.237 106.426,63.246 110.871,67.691 110.871,79.361 119.015,87.505 R25.1
R2_G: R23.1 U1.18 | length 25.4
  Top Layer w0.254: U1.18 106.275,62.342 106.798,62.865 106.807,62.865 111.379,67.437 111.379,74.662 119.015,82.298 R23.1
R2_R: R16.1 U1.17 | length 22.7
  Top Layer w0.254: U1.17 106.61,62.007 107.134,62.53 107.134,62.557 112.245,67.668 112.245,72.607 119.015,79.377 R16.1
R3_G: R14.1 U1.16 | length 17.9
  Top Layer w0.254: U1.16@106.964,61.657 112.753,67.447 112.753,68.162 119.015,74.424 R14.1
R3_R: R11.1 U1.15 | length 16.1
  Top Layer w0.254: U1.15 107.317,61.293 117.182,71.157 118.542,71.157 119.015,71.63 R11.1
R4_G: R8.1 U1.14 | length 13.7
  Top Layer w0.254: U1.14@107.734,60.991 113.672,66.929 R8.1
R4_R: R3.1 U1.13 | length 12.4
  Top Layer w0.254: U1.13 108.043,60.574 111.476,64.008 R3.1
R5_G: R28.1 U1.27 | length 32.2
  Top Layer w0.254: R28.1 88.249,90.426 97.028,81.647 97.028,68.134 U1.27
R5_R: R26.1 U1.28 | length 29.7
  Top Layer w0.254: R26.1 88.138,87.63 88.138,87.616 96.347,79.407 96.347,68.118 101.052,63.413 U1.28
R6_G: R24.1 U1.29 | length 24.7
  Top Layer w0.254: R24.1 88.249,82.425 95.631,75.043 95.631,68.117 95.943,67.805 U1.29
R6_R: R22.1 U1.30 | length 21.9
  Top Layer w0.254: R22.1 89.535,78.343 94.869,73.009 94.869,68.199 99.822,63.246 99.822,63.237 100.345,62.714 U1.30
R7_G: R15.1 U1.31 | length 17.4
  Top Layer w0.254: R15.1 88.249,74.551 88.722,74.078 89.117,74.078 94.234,68.961 94.234,68.072 99.441,62.865 99.45,62.865 99.973,62.342 U1.31
R7_R: R13.1 U1.32 | length 15.5
  Top Layer w0.254: R13.1 89.763,71.882 99.114,62.53 99.638,62.007 U1.32
R8_G: R10.1 U1.33 | length 13.2
  Top Layer w0.254: R10.1 93.875,67.056 U1.33@99.198,61.733
R8_R: R7.1 U1.34 | length 11.9
  Top Layer w0.254: R7.1 96.077,64.135 U1.34
Reset: J1.10 R2.2 Reset.1 U1.7 | length 69.1
  Top Layer w0.254: J1.10 79.629,48.133 79.629,48.006 79.719,47.916 105.574,47.916 107.188,49.53 v1(107.188,52.451) ; v1(103.632,56.642) 104.715,57.725 105.315,57.725 106.709,56.332 106.727,56.332 106.799,56.26 107.949,56.26 107.95,56.261 123.46,56.261 R2.2 ; R2.2@126.365,59.253 Reset.1
  Bottom Layer w0.254: v1(103.632,56.642) 107.188,53.086 v1(107.188,52.451)
SWCLK: J1.4 U1.38 | length 18.5
  Top Layer w0.254: J1.4 86.487,48.895 90.91,48.895 91.059,49.044 91.059,50.68 U1.38@98.05,57.671
SWDIO: J1.2 U1.37 | length 14.2
  Top Layer w0.254: J1.2 90.043,50.546 97.596,58.099 97.771,58.099 U1.37
VIN: C8.2 D2.2 R17.1 U4.7
pads on no net: J1.6 J1.7 J1.8 U1.2 U1.3 U1.4 U1.12 U1.35 U1.36 U1.42 U1.43 U1.45 U1.46 U4.2 U4.3 U4.5

## Polygon pours and split planes (outlines as drawn)
GND on Top Layer "GND_L01_P025" (solid, pour order 25): 71.144,47.191 cw(c71.247,47.266) 71.12,47.266 71.12,109.855 cw(c71.247,109.855) 71.247,109.982 134.112,109.982 cw(c134.112,109.855) 134.239,109.855 134.239,47.415 cw(c134.112,47.415) 134.238,47.393 cw(c134.112,47.371) 134.239,47.371 134.239,47.117 cw(c134.112,47.117) 134.112,46.99 71.247,46.99 cw(c71.247,47.117)
3v3 on Top Layer "3V3_L01_P027" (solid, pour order 27): 103.807,54.991 104.672,54.126 103.124,52.578 101.537,54.166 102.362,54.991
3v3 on Top Layer "3V3_L01_P024" (solid, pour order 24): 103.759,55.245 104.775,54.229 103.124,52.578 101.473,54.229 102.489,55.245
3v3 on Top Layer "3V3_L01_P023" (solid, pour order 23): 104.775,64.897 103.632,63.881 102.489,65.024 102.489,68.072 103.759,68.072 103.759,65.913
+5 on Top Layer "+5_L01_P003" (solid, pour order 3): 110.998,93.091 108.331,93.091 108.331,109.347 110.998,109.347
3v3 on Top Layer "3V3_L01_P018" (solid, pour order 18): 117.729,97.282 113.538,93.091 119.38,93.091 123.825,97.536 123.825,101.6 117.729,101.6
NetR18_1 on Top Layer "NETR18_1_L01_P013" (solid, pour order 13): 101.605,101.346 103.251,101.346 103.378,101.473 103.378,104.775 101.981,104.775 101.605,104.399
NetC7_1 on Top Layer "NETC7_1_L01_P012" (solid, pour order 12): 103.124,96.901 101.727,96.901 101.727,98.044 103.505,98.044 104.902,98.044 104.902,92.71 103.124,92.71
3v3 on Top Layer "3V3_L01_P007" (solid, pour order 7): 118.745,103.378 117.729,102.362 117.729,100.584 121.158,100.584 121.158,102.235 120.015,103.378 120.015,108.458 118.745,108.458
VIN on Top Layer "VIN_L01_P011" (solid, pour order 11): 97.917,99.314 97.79,99.314 92.202,99.314 92.202,97.79 93.853,97.79 93.853,98.425 94.107,98.679 97.917,98.679
VIN on Top Layer "VIN_L01_P010" (solid, pour order 10): 93.472,99.314 89.334,99.314 87.63,101.473 78.613,101.473 78.613,97.79 93.853,97.79 93.853,98.933
12v on Top Layer "12V_L01_P009" (solid, pour order 9): 76.708,108.458 76.708,98.933 74.422,98.933 74.295,98.933 74.295,99.314 74.295,108.458
NetR18_1 on Top Layer "NETR18_1_L01_P008" (solid, pour order 8): 105.41,104.775 105.537,104.648 105.537,103.124 101.6,103.124 101.473,103.251 101.473,104.775 105.283,104.775 105.41,104.648
+5 on Top Layer "+5_L01_P006" (solid, pour order 6): 117.729,106.934 117.729,109.347 108.331,109.347 108.331,106.934
3v3 on Top Layer "3V3_L01_P005" (solid, pour order 5): 117.983,102.362 123.698,102.362 123.698,103.886 123.952,104.14 128.524,104.14 128.524,100.457 117.729,100.457 117.729,102.362
GND on Top Layer "GND_L01_P000" (solid, pour order 0): 98.298,102.108 98.298,92.964 101.346,92.964 101.346,102.108
GND on Top Layer "GND_L01_P004" (solid, pour order 4): 92.202,100.076 92.202,107.188 107.188,107.188 107.188,105.537 101.092,105.537 101.092,100.457 98.425,100.457 98.425,102.489 95.123,102.489 95.123,100.584 97.917,100.584 97.917,100.076
NetC7_2 on Top Layer "NETC7_2_L01_P001" (solid, pour order 1): 94.869,98.044 94.869,90.678 110.109,90.678 110.109,92.202 97.282,92.202 97.282,98.044
GND on Bottom Layer "GND_L02_P026" (solid, pour order 26): 71.144,47.191 cw(c71.247,47.266) 71.12,47.266 71.12,109.855 cw(c71.247,109.855) 71.247,109.982 134.112,109.982 cw(c134.112,109.855) 134.239,109.855 134.239,47.415 cw(c134.112,47.415) 134.238,47.393 cw(c134.112,47.371) 134.239,47.371 134.239,47.117 cw(c134.112,47.117) 134.112,46.99 71.247,46.99 cw(c71.247,47.117)
3v3 on Bottom Layer "3V3_L02_P017" (solid, pour order 17): 102.87,68.072 103.886,68.072 103.886,66.294 101.473,65.786 101.473,85.852 102.997,85.852 102.87,85.725
3v3 on Bottom Layer "3V3_L02_P022" (solid, pour order 22): 117.729,97.282 117.983,97.536 123.698,97.536 123.698,97.409 114.427,88.138 101.875,88.138 103.653,89.916 110.236,89.916

## Silkscreen, mask and mechanical layers (free items; w line width, h text height)
Mechanical 1:
  lines w0.254: 71.247,47.266 71.247,109.855

## Text inside footprints (layer, text, board x,y; h text height)
J1: Top Overlay "2" at 90.095,51.136 h2.03 r180; Top Overlay "1" at 89.814,53.799 h2.03 r180